# Altium PCB 串口mcu板V1.21.PcbDoc
Units mil, origin at the board's own origin, x right, y up, seen from the top; angles counter-clockwise.
Board outline 2362.2 x 1771.65 mil, 2 copper layers (Top Layer, Bottom Layer); 49 components, 76 nets, 217 pads, 41 vias.
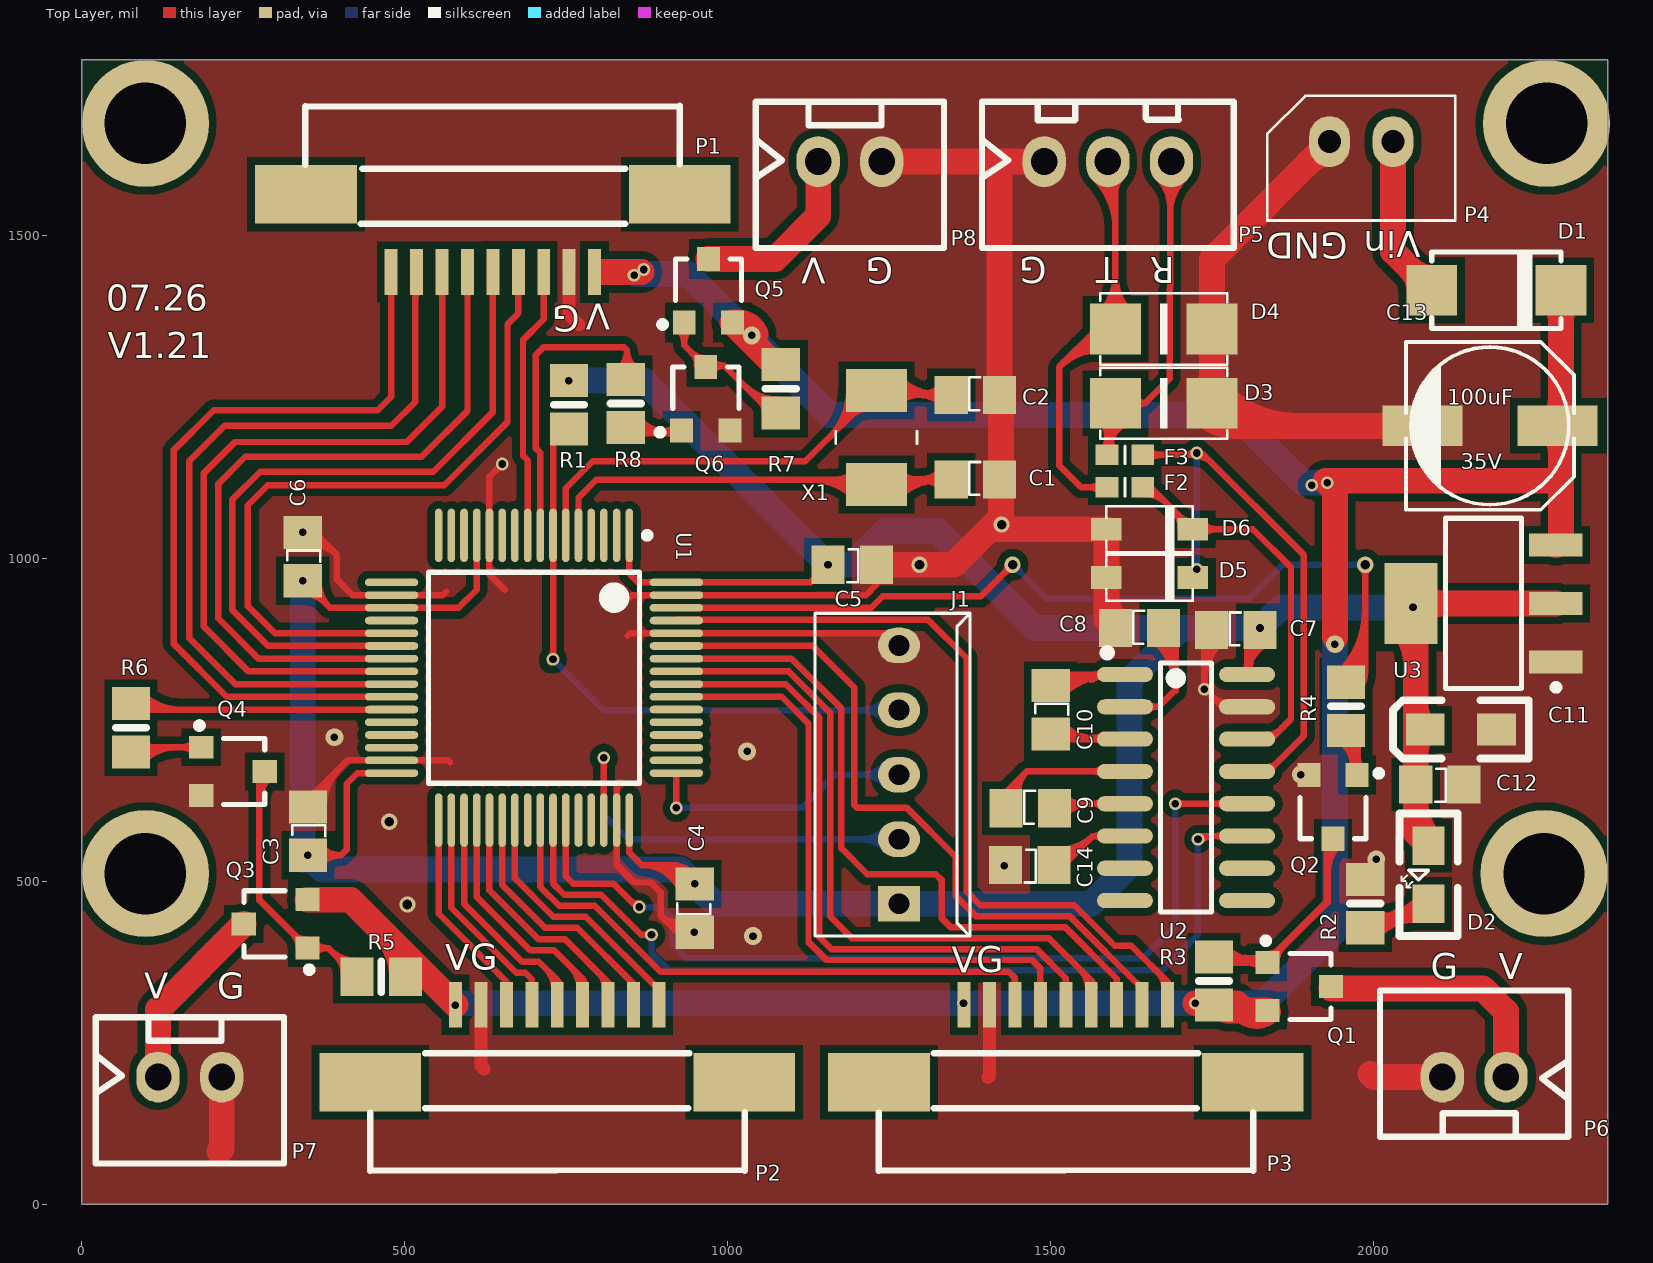
[diagram p0: Top Layer view]
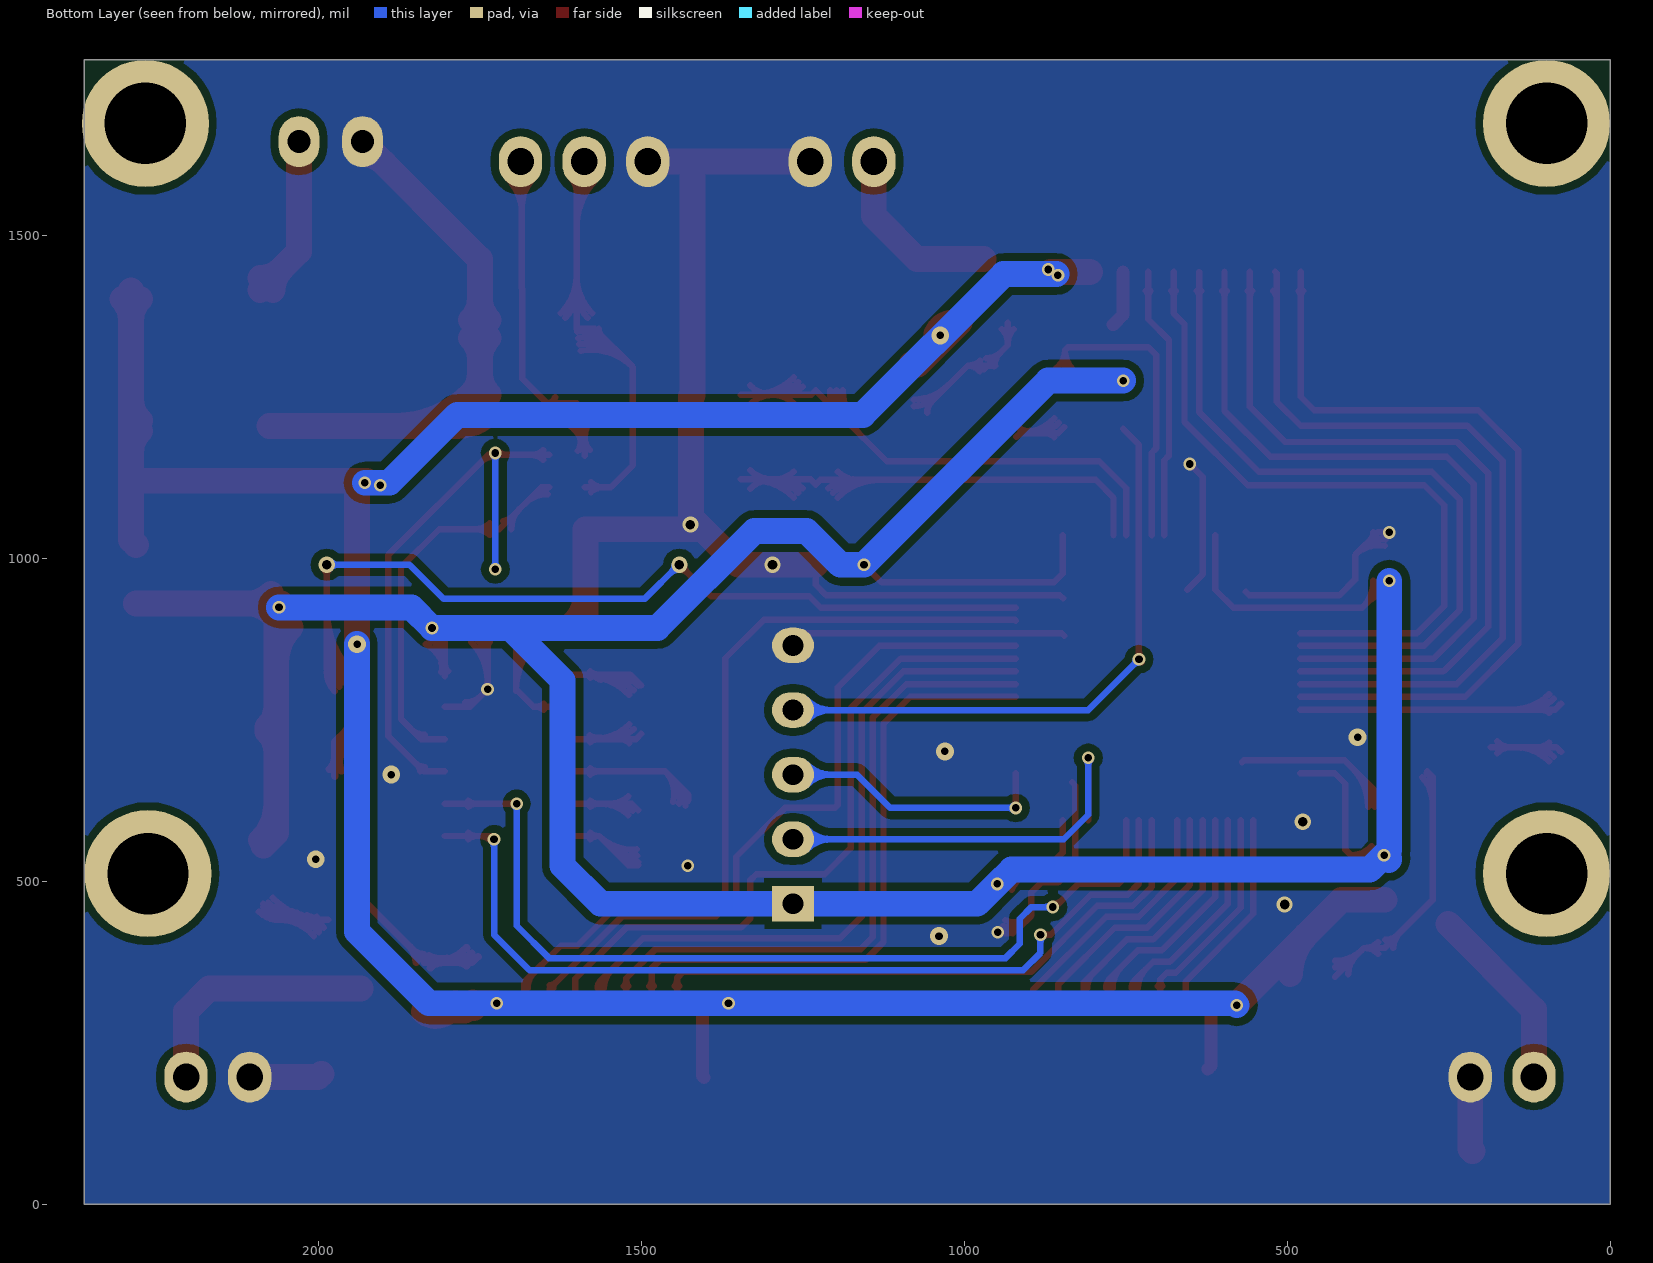
[diagram p1: Bottom Layer view, seen from below]
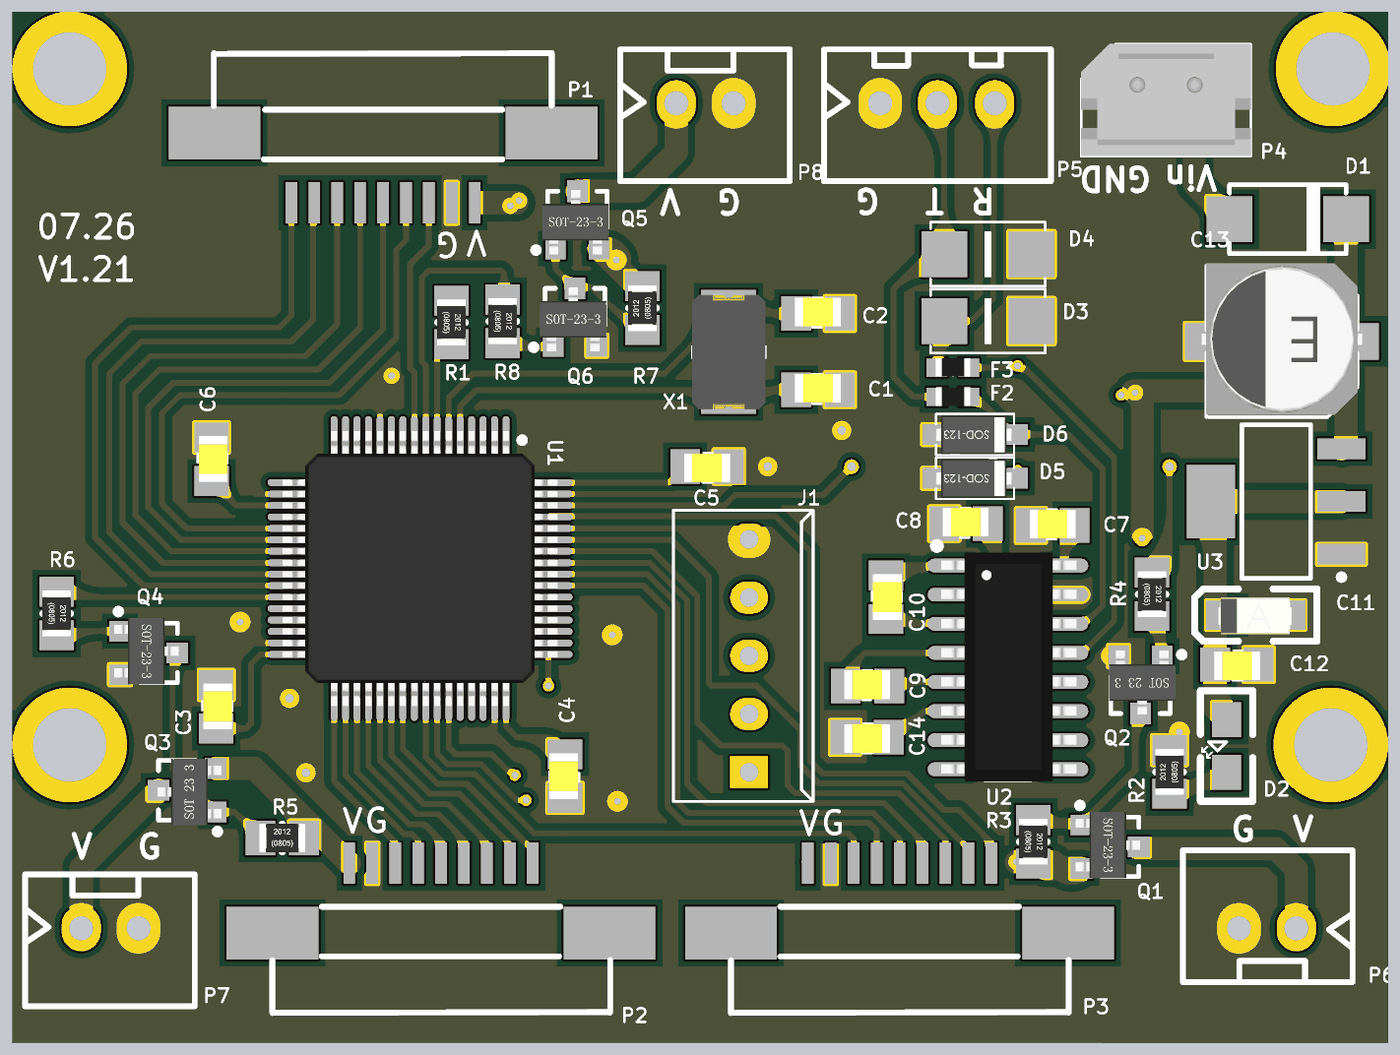
[diagram p2: 3D render of the assembled board from above, using the file's embedded part models]

## Layer stack, top to bottom
Top Layer: signal copper 1.4
Dielectric: dielectric 12.6, FR-4, Dk 4.8
Bottom Layer: signal copper 1.4

## Board outline
0,0 2362.2,0 2362.2,1771.65 0,1771.65

## Design rules (kind name [scope] priority, off if disabled: settings)
Clearance [All] p1: gap=12
ComponentClearance [All] p1 off: gap=10 collisioncheckmode=3 verticalgap=10 showdistances=FALSE
PolygonConnect [All] p1: connectstyle=Direct reliefconductorwidth=10 reliefentries=4 polygonreliefangle="90 Angle"
RoutingVias [All] p1: holewidth=28 width=50 viastyle="Through Hole" minholewidth=28 minwidth=50 maxholewidth=28 maxwidth=50
SilkscreenOverComponentPads [All] p1: minsilkscreentomaskgap=10
SolderMaskExpansion [All] p1: expansion=4
Width [All] p1: maxlimit=100 minlimit=10 preferedwidth=10 minimp=50.000000 maximp=50.000000 favimp=50.000000
26 further rules are at their usual default settings.

## Classes and differential pairs
component class U_Power: C8 C9 C10 C11 C12 C13 C14 D1 D2 D3 D4 D5 D6 F2 F3 P4 P5 P6 P7 P8 Q1 Q2 Q3 Q4 Q5 Q6 R2 R3 R4 R5 R6 R7 R8 U2 U3
component class MCU: C1 C2 C3 C4 C5 C6 C7 J1 P1 P2 P3 R1 U1 X1

## Components (designator, comment, footprint, x,y, rotation, side; value= is the part's Value field where it differs from the comment)
C1 "20pF" C2012 1346,1122 r0 top
C2 "20pF" C2012 1346,1253 r0 top
C3 "0.1uF" C2012 350,615 r270 top
C4 "0.1uF" C2012 949,421 r90 top
C5 "0.1uF" C2012 1230,990 r180 top
C6 "0.1uF" C2012 342,1040 r270 top
C7 "0.1uF" C2012 1749,889 r0 top
C8 "0.1uF" C2012 1600,892 r0 top
C9 "0.1uF" C2012 1431,613 r0 top
C10 "0.1uF" C2012 1500,803 r270 top
C11 "100uF/6.3V" 3216 2080,735 r180 top
C12 "0.1uF" C2012 2140,650 r180 top
C13 "100uF/35V" ECS6.3/6.6 2180,1205 r0 top
C14 "0.1uF" C2012 1505,525 r180 top
D1 "SS34" SMA_DO-214AC 2090,1415 r0 top
D2 "红色发光二极管" LED/S 2085,555 r270 top (schematic designator D6)
D3 "RLM102-201M" RLM102 1675,1240 r0 top
D4 "RLM102-201M" RLM102 1675,1355 r0 top
D5 "SMFJ15" SOD-123 1720,970 r180 top
D6 "SMFJ15" SOD-123 1720,1045 r180 top
F2 "SMD0603P010TF" 1608 1615,1110 r0 top
F3 "SMD0603P010TF" 1608 1615,1160 r0 top
J1 "SWD" ch2.5/5 1265,465 r90 top (schematic designator J2)
P1 "Header 9" FPC-9B 900,1496.06 r180 top locked
P2 "Header 9" FPC-9B 472.44,255.91 r0 top locked
P3 "Header 9" FPC-9B 1259.84,255.91 r0 top locked
P4 "PowerIN" 5264-2 2030,1645 r180 top locked
P5 "Header 3" B3B-XH-A 1490,1614.17 r0 top locked
P6 "LED_POWER" B2B-XH-A 2204.72,196.85 r180 top locked
P7 "LED_POWER" B2B-XH-A 118.11,196.85 r0 top locked
P8 "LED_POWER" B2B-XH-A 1140,1614.17 r0 top locked
Q1 "AO3401" SOT-23 1885,337 r270 top
Q2 "9013" sot-23 1937,615 r180 top
Q3 "AO3401" SOT-23 300,434 r90 top
Q4 "9013" sot-23 234,670 r270 top
Q5 "AO3401" SOT-23 970,1414 r0 top
Q6 "9013" sot-23 966,1247 r0 top
R1 "10K" 2012 754,1275 r270 top
R2 "1K" 2012 1987,428 r90 top
R3 "10K" 2012 1753,383 r270 top
R4 "10K" 2012 1957,808 r270 top
R5 "10K" 2012 426,352 r0 top
R6 "10K" 2012 76,775 r270 top
R7 "10K" 2012 1082,1225 r90 top
R8 "10K" 2012 842,1277 r270 top
U1 "STM32F105R" LQFP64_M 700,815 r270 top
U2 "MAX3232" SO16 1615,820 r270 top
U3 "AS1117-3V3" SOT223_L 2170,930 r180 top
X1 "25MHz" SMD2_50X32 1230,1187 r90 top

## Footprints (in the part's own frame and the unit in brackets; to place one, negate y for a bottom-side part, rotate by r counter-clockwise, add the part's x,y. Pads: shape width x height; smd on the part's side, far side on the other; paste and mask are expansions set on the pad)
1608 [mm]
  rect 0.9x0.8 smd: 1(-0.7,0) 2(0.7,0)
  silkscreen extent 0,-0.35 0,0.35, body extent -0.75,-0.39 0.75,0.41, height 0.45
2012 [mm]
  rect 1.3x1.5 smd: 1(0,0) 2(1.9,0)
  silkscreen extent 0.95,-0.6 0.95,0.6, body extent -0.05,-0.62 1.95,0.62, height 0.45
3216 [mil]
  rect 60x50 smd: 1(0,0) 2(-110,0)
  silkscreen extent -160,-45 50,45, body extent -117,-30 9,33, height 63
5264-2 [mm]
  oval 1.6x2 hole 0.9: 1(0,0) 2(2.5,0)
  silkscreen extent -2.45,-1.8 4.95,3.1, body extent -2.46,-1.82 4.94,3.08, height 5.95
B2B-XH-A [mm]
  oval 1.7x2 hole 1.05: 1(0,0) 2(2.5,0)
  silkscreen extent -2.45,-3.4 4.95,2.35
B3B-XH-A [mm]
  oval 1.7x2 hole 1.05: 1(0,0) 2(2.5,0) 3(5,0)
  silkscreen extent -2.45,-3.4 7.45,2.35
C2012 [mm]
  rect 1.3x1.5 smd: 1(0,0) 2(1.9,0)
  silkscreen extent 0.71,-0.61 1.14,0.69, body extent -0.06,-0.56 1.94,0.69, height 0.5
ch2.5/5 [mil]
  rect 55x65 hole 32: 1(0,0)
  oval 55x65 hole 32: 2(100,0) 3(200,0) 4(300,0) 5(400,0)
  silkscreen extent -50,-110 450,130, body extent -50,-110 450,130, height 394
ECS6.3/6.6 [mm]
  rect 3.15x1.6 smd: 1(2.65,0) 2(-2.65,0)
  silkscreen extent -3.3,-3.3 3.3,3.3, body extent -3.5,-3.2 3.5,3.4, height 5.2
FPC-9B [mm]
  rect 4x2.3 smd: 0(-0.655,-1.708) 0(14.045,-1.708)
  rect 0.508x1.8 smd: 1(2.695,1.342) 2(3.695,1.342) 3(4.695,1.342) 4(5.695,1.342) 5(6.695,1.342) 6(7.695,1.342) 7(8.695,1.342) 8(9.695,1.342) 9(10.695,1.342)
  silkscreen extent -0.66,-5.2 14.07,-0.56
LED/S [mil]
  rect 60x50 smd: A(0,0) K(90,0)
  silkscreen extent -50,-45 140,45, body extent 9,-25 88,25, height 43
LQFP64_M [mm]
  oval 2.1x0.3 smd: 1(-5.6,3.75) 2(-5.6,3.25) 3(-5.6,2.75) 4(-5.6,2.25) 5(-5.6,1.75) 6(-5.6,1.25) 7(-5.6,0.75) 8(-5.6,0.25) 9(-5.6,-0.25) 10(-5.6,-0.75) 11(-5.6,-1.25) 12(-5.6,-1.75) 13(-5.6,-2.25) 14(-5.6,-2.75) 15(-5.6,-3.25) 16(-5.6,-3.75) 33(5.6,-3.75) 34(5.6,-3.25) 35(5.6,-2.75) 36(5.6,-2.25) 37(5.6,-1.75) 38(5.6,-1.25) 39(5.6,-0.75) 40(5.6,-0.25) 41(5.6,0.25) 42(5.6,0.75) 43(5.6,1.25) 44(5.6,1.75) 45(5.6,2.25) 46(5.6,2.75) 47(5.6,3.25) 48(5.6,3.75)
  oval 0.3x2.1 smd: 17(-3.75,-5.6) 18(-3.25,-5.6) 19(-2.75,-5.6) 20(-2.25,-5.6) 21(-1.75,-5.6) 22(-1.25,-5.6) 23(-0.75,-5.6) 24(-0.25,-5.6) 25(0.25,-5.6) 26(0.75,-5.6) 27(1.25,-5.6) 28(1.75,-5.6) 29(2.25,-5.6) 30(2.75,-5.6) 31(3.25,-5.6) 32(3.75,-5.6) 49(3.75,5.6) 50(3.25,5.6) 51(2.75,5.6) 52(2.25,5.6) 53(1.75,5.6) 54(1.25,5.6) 55(0.75,5.6) 56(0.25,5.6) 57(-0.25,5.6) 58(-0.75,5.6) 59(-1.25,5.6) 60(-1.75,5.6) 61(-2.25,5.6) 62(-2.75,5.6) 63(-3.25,5.6) 64(-3.75,5.6)
  silkscreen extent -5.72,-4.15 4.15,4.58, body extent -6,-6 6,6, height 1.6
RLM102 [mm]
  rect 2x2 smd: 1(-1.9,0) 2(1.9,0)
  silkscreen extent -2.5,-1.4 2.5,1.4
SMA_DO-214AC [mm] "5.08mm X 3.0mm SMD"
  rect 2x2 smd: 1(0,0) 2(5.08,0)
  silkscreen extent 0,-1.5 5.08,1.5, body extent -0.03,-1.6 5.11,1.6, height 2
SMD2_50X32 [mm]
  rect 1.7x2.4 smd: 1(1.85,0) 2(-1.85,0)
  silkscreen extent -0.25,-1.6 0.25,1.6, body extent -2.51,-1.6 2.49,1.6, height 1.35
SO16 [mm]
  oval 0.6x2.2 smd: 1(0,0) 2(1.27,0) 3(2.54,0) 4(3.81,0) 5(5.08,0) 6(6.35,0) 7(7.62,0) 8(8.89,0) 9(8.89,4.8) 10(7.62,4.8) 11(6.35,4.8) 12(5.08,4.8) 13(3.81,4.8) 14(2.54,4.8) 15(1.27,4.8) 16(0,4.8)
  silkscreen extent -1,-0.85 9.34,3.4, body extent -0.57,-0.52 9.41,5.38, height 1.45
SOD-123 [mm]
  rect 1.2x0.9 smd: 1(3.4,0) 2(0,0)
  silkscreen extent 0,-0.91 3.4,0.9, body extent -0.17,-0.84 3.68,0.86, height 0.92
SOT223_L [mm] "SOT223, 4-Leads, Body 6.5x3.5mm, Pitch 2.3mm, Lead Span 7mm, IPC High Density"
  rect 2.1x0.9 smd: 1(-2.85,2.3) 2(-2.85,0) 3(-2.85,-2.3)
  rect 2.1x3.2 smd: 2(2.85,0)
  silkscreen extent -2.98,-3.35 1.5,3.42, body extent -1.85,-3.35 1.85,3.35, height 1.7
SOT-23 [mm]
  rect 0.9x0.95 smd: 1(-0.95,-1.25) 2(0.95,-1.25) 3(0,1.25)
  silkscreen extent -1.93,-1.45 1.3,1.25, body extent -1.53,-1.5 1.37,1.3, height 1.2
sot-23 [mm]
  rect 0.9x0.95 smd: 1(-0.95,-1.25) 2(0.95,-1.25) 3(0,1.25)
  silkscreen extent -1.93,-1.45 1.3,1.25, body extent -1.53,-1.5 1.37,1.3, height 1.2

## Part data
C1 C2 C3 C4 C5 C6 C7 C12: library part Cap, "Capacitor"
C8 C9 C10 C14: library part CAP, "Capacitor"
C11 C13: library part "Cap Pol1", "Polarized Capacitor (Radial)"
D1 D5 D6: library part Diode, "Default Diode"
D2: library part LED
D3 D4 F2 F3 R1 R2 R3 R4 R5 R6 R7 R8: library part Res2, "Resistor"
J1: library part "Header 5", "Header, 5-Pin"
P1 P2 P3: "Header, 9-Pin"
P4 P6 P7 P8: library part "Header 2", "Header, 2-Pin"
P5: "Header, 3-Pin"
Q1 Q3 Q5: library part PMOS-2, "P-Channel Power MOSFET"
Q2 Q4 Q6: library part NPNBT
U1: library part STM32F
U2: library part ST3232, "3.3V/5V Dual RS232 Transceiver w/ Int. Cap."
U3: library part LM117T
X1: library part CRYSTAL

## Free pads (board coordinates)
  round 196.85 hole 125.98: 0(98.43,511.81) 0(98.43,1673.23) 0(2263.78,511.81) 0(2267.72,1673.23)

## Via types
v1: diameter 19.68, hole 11.81, Top Layer to Bottom Layer, 28 vias
v2: diameter 27.56, hole 11.81, Top Layer to Bottom Layer, 7 vias
v3: diameter 25, hole 15, Top Layer to Bottom Layer, 6 vias

## Nets (pads, with @x,y where several pads share a name; then routed paths per layer and width w, separated by ;. In a path a pad name is that pad's centre, name@x,y a point inside that pad or via, vN(x,y) a via of type N, cw(c..) or ccw(c..) an arc to the next point about the centre after c; other vN are vias at no path point)
+3V3: C3.2 C4.2 C5.2 C6.2 C7.2 C11.1 C12.2 D2.A J1.1 R1.1 U1.1 U1.13 U1.19 U1.32 U1.48 U1.64 U2.16 U3.2 | length 6705.5
  Top Layer w10: C6.2@342,960.35 cw(c342,948.66) 350.27,956.93 cw(c358.53,965.2) C6.2@346.84,965.2 ; v1(342,965.2) 383.93,923.27 U1.19 583.27,923.27 611.42,951.42 U1.13 ; C6.2@345.94,944.61 cw(c345.94,904.4) 374.37,932.83 ; v1(350,540.2) 401.2,540.2 ; C3.2@353.42,536.77 cw(c361.69,528.51) 361.69,540.2 cw(c361.69,551.89) C3.2@353.42,543.62 ; C6.2@356.53,965.2 ccw(c391.6,965.2) C6.2@366.8,940.4 ; C6.2@366.53,965.2 ccw(c425.74,965.2) 383.87,923.33 ; C3.2@369.02,526.18 cw(c401.19,496.26) 401.19,540.2 ; C3.2@369.02,554.22 ccw(c401.19,584.13) 401.19,540.2 ; U1.32 426.36,667.36 410,651 410,549 401.2,540.2 ; U1.48 847.64,544.36 867,525 ; U1.1 847.64,976.36 861.36,962.64 U1.64 1127.83,962.64 v1(1155.2,990) ; 882.68,525 cw(c882.68,466.79) C4.2@935.46,491.34 ; 898.36,525 cw(c898.36,474.08) C4.2@944.53,495.55 ; 914.04,525 cw(c914.04,481.38) C4.2@953.6,499.77 ; C4.2@924.83,499.63 ccw(c896.91,504.9) 917,525 ; C4.2@926.39,487.12 ccw(c867,459.5) 867,525 ; C4.2@933.18,509.11 ccw(c951.54,524.48) C4.2@949.43,500.63 ; C4.2@935.95,506.05 ccw(c949,519.1) C4.2@949,500.65 ; C4.2@939.79,516.25 cw(c922.95,502.15) C4.2@944.3,496.95 ; C4.2@942.52,516.24 cw(c938.72,546.72) 917,525 ; v1(949,495.8) 946.2,495.8 917,525 ; C5.2@1150.35,990 cw(c1138.66,990) 1146.93,981.73 cw(c1155.2,973.47) C5.2@1155.2,985.16 ; U2.16@1799.16,824.82 ccw(c1787.53,836.44) 1803.98,836.44 ccw(c1820.42,836.44) U2.16@1808.79,824.82 ; U2.16@1800.57,825.9 ccw(c1791.05,842.4) 1809.45,837.47 ; U2.16@1803.98,817.05 cw(c1860.82,817.05) C7.2@1833.65,866.98 ; U2.16 1803.98,869.17 C7.2 ; 1803.98,833.88 cw(c1851.66,833.88) C7.2@1828.87,875.76 ; 1803.98,850.71 cw(c1842.5,850.71) C7.2@1824.09,884.54 ; C7.2@1803.98,867.53 cw(c1833.34,867.53) C7.2@1819.3,893.33 ; C7.2@1808.44,883 cw(c1819.86,870.99) C7.2@1823.06,887.25 ; 1808.49,833.9 ccw(c1821.86,830.32) U2.16@1809.87,823.41 ; C7.2@1809.74,870.9 ccw(c1788.83,892.89) C7.2@1819.16,892.12 ; C7.2@1813.75,878.95 ccw(c1800.7,892) C7.2@1819.16,892 ; 867,525 917,525
  Top Layer w40: U3.2@2042.71,893.26 cw(c1988.41,838.96) 2065.2,838.96 ; 2065.2,619.88 ccw(c2144.88,619.88) D2.A@2088.54,563.54 ; 2065.2,699.26 cw(c2110.74,699.26) C11.1@2078.54,731.46 ; 2065.2,770.74 ccw(c2110.74,770.74) C11.1@2078.54,738.54 ; U3.2@2072.88,914.91 cw(c2109.31,878.48) 2109.31,930 cw(c2109.31,981.52) U3.2@2072.88,945.09 ; D2.A 2065.2,574.8 C12.2 2065.2,922.6 2057.8,930 U3.2@2282.2,930
  Bottom Layer w40: v1@342,534.99 ccw(c344.79,534.99) 342.82,533.01 ; v1(342,965.2) 342,548.2 v1(350,540.2) 372.2,518 926.8,518 v1(949,495.8) 979.8,465 J1.1 1563,465 1622,524 1622,811 1703,892 ; v1(754,1275) 870.2,1275 v1(1155.2,990) 1192,990 1244,1042 1325,1042 1475,892 v1(1824,892) 1856,924 v1(2061,924)
GND: C1.2 C2.2 C3.1 C4.1 C5.1 C6.1 C7.1 C8.1 C11.2 C12.1 C13.2 C14.2 D3.2 D4.2 D5.1 D6.1 J1.5 P1.2 P2.2 P3.2 P4.2 P5.1 P6.2 P7.2 P8.2 Q2.2 Q4.2 Q6.2 R2.2 U1.12 U1.18 U1.31 U1.47 U1.60 U1.63 U2.15 U3.1 | length 6013.5
  Top Layer w10: v1(342,1040) 360,1040 395,1005 ; C6.1@345.42,1036.58 cw(c353.69,1028.31) 353.69,1040 cw(c353.69,1051.69) C6.1@345.42,1043.42 ; C6.1@347.66,1029.55 cw(c353.95,991.48) 381.23,1018.77 ; C6.1@349.29,1019.68 cw(c357.85,967.86) 395,1005 ; C3.1 350,626 411.05,687.05 U1.31 566.95,687.05 570,684 ; C3.1@353.94,635.59 ccw(c353.94,649.24) C3.1@363.59,639.59 ; C3.1@354.53,615 cw(c392.01,615) 365.51,641.51 ; C3.1@364.53,615 cw(c426.16,615) 382.58,658.58 ; C6.1@366.53,1040 ccw(c382.29,1040) C6.1@371.14,1028.86 ; C3.1@374.53,615 cw(c460.3,615) 399.65,675.65 ; 564,948 558.95,942.95 U1.18 419.05,942.95 395,967 395,1005 ; v1@646.16,1146 cw(c634.47,1146) 642.73,1137.73 cw(c651,1129.47) v1@651,1141.16 ; v1(651,1146) 631.1,1126.1 U1.12 631.1,974.9 655,951 ; 833,653 827.95,647.95 U1.47 827.95,525.05 855,498 881,498 896,483 896,447 ; 845,880 848.9,883.9 U1.60 1246.1,883.9 J1.5 ; 847,938 851.95,942.95 U1.63 1213.95,942.95 1230,959 C5.1 ; 906.17,436.83 ccw(c927.87,458.53) C4.1@940.65,430.63 ; 916.34,426.66 ccw(c934.26,444.58) C4.1@944.82,421.54 ; C4.1@921.82,427 cw(c921.82,394.82) C4.1@944.58,417.58 ; C4.1@924.55,419.17 ccw(c916,418.41) 916,427 ; C4.1@928.55,433.3 cw(c916,442.65) 916,427 ; C4.1@934.88,419.85 cw(c937,407.34) C4.1@944.96,417.23 ; C4.1@936.49,439.72 cw(c921.48,472.48) 896,447 ; C4.1 943,427 916,427 ; C7.1@1734.44,870.5 cw(c1725.85,861.91) C7.1@1738,861.91 ; v1@1734.58,800.42 ccw(c1726.31,808.69) 1738,808.69 ccw(c1749.69,808.69) v1@1741.42,800.42 ; v1@1738,792.16 cw(c1738,780.47) 1746.27,788.73 cw(c1754.53,797) v1@1742.84,797 ; 1738,808.8 cw(c1825.27,808.8) C7.1@1763.56,870.5 ; 1738,832.94 cw(c1801.12,832.94) C7.1@1756.49,877.57 ; 1738,857.08 cw(c1776.98,857.08) C7.1@1749.42,884.65 ; 1748.08,786.92 ccw(c1772.48,811.31) U2.15@1772.48,776.81 ; C7.1 1738,878 v1(1738,797) 1765,770 U2.15 ; 896,447 916,427
  Top Layer w20: P2.2 617.91,214.09 623,209 ; P1.2 754.53,1376.47 769.5,1361.5 ; 1403,196 1405.31,198.31 P3.2
  Top Layer w40: 213,82 216.54,85.54 P7.2 P7.2@226,206.31 ; C5.1 1349.61,990 1404.61,1045 ; P8.2 1416,1614.17 ; P5.1 1416,1614.17 ; 1586.14,942.89 ccw(c1646.95,942.89) C8.1@1603.95,899.89 ; C8.1 1586.14,905.86 D5.1 D6.1 1404.61,1045 ; D3.2@1735.22,1225.41 ccw(c1784.5,1274.69) D3.2@1784.5,1205 ; D3.2@1736.11,1253.7 ccw(c1703.04,1286.76) 1749.8,1286.76 ccw(c1796.57,1286.76) 1763.5,1253.7 ccw(c1881.06,1371.26) 1881.06,1205 ; D4.2@1736.11,1341.3 cw(c1703.04,1308.24) 1749.8,1308.24 cw(c1796.57,1308.24) D4.2@1763.5,1341.3 ; D4.2@1736.11,1368.7 ccw(c1703.04,1401.76) 1749.8,1401.76 ccw(c1796.57,1401.76) D4.2@1763.5,1368.7 ; 1898.51,1611.93 cw(c1931.57,1578.87) P4.2@1931.57,1625.63 ; P4.2 1749.8,1463.23 D4.2 D3.2 1784.8,1205 C13.2 ; 1995,202 2000.15,196.85 P6.2 ; 1404.61,1045 1423,1063.39 1423,1250.8 C2.2 1420.8,1609.37 1416,1614.17
  other v1: 948,421 1428,524
  other v2: 1039,415 2004,534 1887,665 1030,701 391,723
  other v3: 504,464 476,592 1297,990 1424,1052
JTCK/SWCLK: J1.3 U1.49 | length 591.3
  Top Layer w10: v1@917.05,616.9 ccw(c908.78,625.16) 920.47,625.16 ccw(c932.16,625.16) v1@923.9,616.9 ; v1@919,612 v1(920.47,613.47) U1.49
  Bottom Layer w10: v1(920.47,613.47) 1114.47,613.47 1166,665 J1.3 ; v1@923.9,610.05 cw(c932.16,601.78) 932.16,613.47 cw(c932.16,625.16) v1@923.9,616.9 ; J1.3@1244.09,649.09 ccw(c1205.68,610.68) 1205.68,665 ccw(c1205.68,719.32) J1.3@1244.09,680.91 ; J1.3@1251.16,656.16 ccw(c1229.82,634.82) 1229.82,665 ccw(c1229.82,695.18) J1.3@1251.16,673.84
JTMS/SWDIO: J1.2 U1.46 | length 826.8
  Top Layer w10: v1@804.58,687.58 cw(c795.66,678.66) 808.27,678.66 ; v1(808,691) 808.27,690.73 U1.46 ; 808.27,679.96 cw(c819.04,679.96) v1@811.42,687.58
  Bottom Layer w10: v1@804.58,687.58 cw(c796.31,679.31) 808,679.31 cw(c819.69,679.31) v1@811.42,687.58 ; v1(808,691) 808,603 846,565 J1.2 ; J1.2@1244.09,549.09 ccw(c1205.68,510.68) 1205.68,565 ccw(c1205.68,619.32) J1.2@1244.09,580.91 ; J1.2@1251.16,556.16 ccw(c1229.82,534.82) 1229.82,565 ccw(c1229.82,595.18) J1.2@1251.16,573.84
NetC8_2: C8.2 U2.2 | length 431.3
  Top Layer w10: U2.2 1667,770 1694,797 C8.2@1694,871.2 ; U2.2@1651.31,765.18 cw(c1662.94,753.56) 1662.94,770 cw(c1662.94,786.44) U2.2@1651.31,774.82 ; C8.2@1660.58,873.18 cw(c1585.87,795) 1694,795 ; C8.2@1667.49,880.41 cw(c1608.22,818.39) 1694,818.39 ; C8.2@1674.4,887.64 cw(c1630.57,841.78) 1694,841.78 ; C8.2@1681.3,894.87 cw(c1652.93,865.17) C8.2@1694,865.17
NetC9_1: C9.1 U2.4 | length 367.4
  Top Layer w10: C9.1@1431,621 1427,625 1427,634 1463,670 ; C9.1@1431.57,617.1 cw(c1459.81,625.24) 1439.03,646.03 ; C9.1@1441.18,619.87 cw(c1478.42,630.6) 1451.01,658.01 ; C9.1@1450.79,622.64 cw(c1497.03,635.97) 1463,670 ; U2.4@1578.69,665.18 ccw(c1567.06,653.56) 1567.06,670 ccw(c1567.06,686.44) U2.4@1578.69,674.82 ; U2.4 1463,670
NetC9_2: C9.2 U2.5 | length 246.5
  Top Layer w10: C9.2@1504.8,610 1514.8,620 U2.5 ; C9.2@1513.29,609.45 cw(c1538.77,583.97) 1538.77,620 ; C9.2@1520.36,602.38 cw(c1562.91,559.83) 1562.91,620 ; C9.2@1520.36,631.5 ccw(c1548.12,659.25) 1548.12,620 ; U2.5@1578.69,615.18 ccw(c1567.06,603.56) 1567.06,620 ccw(c1567.06,636.44) U2.5@1578.69,624.82
NetC10_1: C10.1 U2.1 | length 365.2
  Top Layer w10: C10.1 1517,820 U2.1 ; C10.1@1504.35,802.58 cw(c1546.4,760.53) 1546.4,820 ; C10.1@1511.43,795.51 cw(c1570.55,736.39) 1570.55,820 ; C10.1@1518.5,788.44 cw(c1594.69,712.25) U2.1@1594.69,820 ; 1561.8,811.63 ccw(c1555.42,836.69) U2.1@1577.65,823.48 ; U2.1@1578.69,815.18 ccw(c1567.06,803.56) 1567.06,820 ccw(c1567.06,836.44) U2.1@1578.69,824.82
NetC10_2: C10.2 U2.3 | length 282.8
  Top Layer w10: C10.2 1508.2,720 U2.3 ; C10.2@1511.43,735.69 ccw(c1549.29,773.55) 1549.29,720 ; C10.2@1518.5,713.64 cw(c1533.86,698.28) 1533.86,720 ; C10.2@1518.5,742.76 ccw(c1573.44,797.7) U2.3@1573.44,720 ; 1562.13,722.36 ccw(c1566.92,745.33) U2.3@1579.77,725.7 ; U2.3@1578.69,715.18 ccw(c1567.06,703.56) 1567.06,720 ccw(c1567.06,736.44) U2.3@1578.69,724.82
NetC14_1: C14.1 U2.6 | length 299.4
  Top Layer w10: C14.1 1520,525 1565,570 ; C14.1@1505.06,529.52 ccw(c1508.87,566.64) 1535.26,540.26 ; C14.1@1506.08,539.47 ccw(c1511.64,593.61) 1550.13,555.13 ; C14.1@1507.1,549.42 ccw(c1514.41,620.58) 1565,570 ; U2.6@1578.69,565.18 ccw(c1567.06,553.56) 1567.06,570 ccw(c1567.06,586.44) U2.6@1578.69,574.82 ; U2.6 1565,570
NetD1_1: D1.1 P4.1 | length 328.3
  Top Layer w40: P4.1 2030,1475 D1.1 ; D1.1@2070.63,1415 ccw(c2023.87,1415) 2056.93,1448.07 ccw(c2090,1481.13) D1.1@2090,1434.37
NetD2_K: D2.K R2.1 | length 644.8
  Top Layer w10: R2.1@1985,440 D2.K@2060,440 ; R2.1@1988.43,440 ccw(c1988.43,556.57) D2.K@2070.86,474.14 ; R2.1@1991.39,427.62 cw(c2017.62,406.03) 2017.62,440 ; R2.1@1991.45,427.7 cw(c2028.69,405.75) 2017.88,447.61 ; R2.1@1999.11,421.27 cw(c2038.81,388.58) 2038.81,440 ; R2.1@1999.67,422.01 cw(c2042.8,392.47) 2033.19,443.85 ; R2.1@2000.06,422.62 cw(c2058.1,388.41) 2041.25,453.64 ; R2.1@2002.57,444.99 ccw(c2015.58,463.97) 2019.8,441.35 ; R2.1@2006.83,414.91 cw(c2060,371.13) 2060,440 ; R2.1@2012.57,440 ccw(c2012.57,532.43) D2.K@2077.93,467.07 ; 2036.72,440 ccw(c2036.72,508.28) D2.K@2085,460 ; D2.K@2060.86,440 ccw(c2060.86,484.14) D2.K@2092.07,452.93 ; D2.K D2.K@2060,440
NetP6_1: P6.1 Q1.3 | length 386.7
  Top Layer w40: Q1.3@1934.21,334 2169,334 2204.72,298.28 P6.1
NetP7_1: P7.1 Q3.3 | length 292.1
  Top Layer w40: P7.1 118.11,301.32 Q3.3
NetP8_1: P8.1 Q5.3 | length 281.8
  Top Layer w40: Q5.3 1073.21,1463.21 1140,1530 P8.1
NetQ1_1: Q1.1 Q2.3 R3.1 | length 635.2
  Top Layer w12: R3.1 1761.6,374.4 Q1.1@1834.4,374.4 ; R3.1@1762.3,388.37 ccw(c1796.02,422.08) 1796.02,374.4 ; R3.1@1770.79,369.15 cw(c1783.47,356.46) 1783.47,374.4 ; R3.1@1770.79,396.85 ccw(c1824.99,451.05) Q1.1@1824.99,374.4 ; 1800.9,380.86 ccw(c1810.47,416.55) Q1.1@1828.94,384.55 ; 1812.75,377.68 cw(c1807.67,358.74) Q1.1@1824.66,368.54 ; Q1.1@1826.52,366.12 ccw(c1806.52,346.12) 1806.52,374.4 ccw(c1806.52,402.69) Q1.1@1826.52,382.69 ; Q1.1 Q1.1@1834.4,374.4 ; Q1.1@1836.77,386.12 ccw(c1836.77,408.68) 1852.73,392.73 ; Q1.1@1848.49,374.4 cw(c1882.5,374.4) 1858.45,398.45 ; 1928,514.79 cw(c1987.01,514.79) Q2.3@1945.28,556.52 ; 1928,543.76 cw(c1958.04,543.76) Q2.3@1936.8,565 ; Q2.3 1928,556.79 1928,468 Q1.1@1834.4,374.4
NetQ2_1: Q2.1 R4.2 | length 272.5
  Top Layer w12: R4.2@1948.44,718.11 cw(c1902.75,662.91) Q2.1@1974.4,662.91 ; R4.2@1956.1,727.35 cw(c1923.87,688.43) 1974.4,688.43 ; R4.2 1974.4,715.8 Q2.1 ; Q2.1@1964.25,671.06 ccw(c1941.5,684.19) 1966.88,690.99 ; Q2.1@1966.12,673.48 ccw(c1946.12,693.48) 1974.4,693.48 ccw(c2002.69,693.48) Q2.1@1982.69,673.48 ; 1966.14,693.74 ccw(c1995.41,701.59) Q2.1@1980.26,675.34
NetQ3_1: Q3.1 Q4.3 R5.1 | length 672.9
  Top Layer w10: 275,621.85 cw(c330.38,621.85) Q4.3@291.22,661.01 ; 275,645.99 cw(c306.24,645.99) Q4.3@284.15,668.08 ; Q4.3 275,661.79 275,470.81 Q3.1 381.4,396.6 R5.1 ; 325.82,419.99 cw(c302.44,396.6) Q3.1@335.51,396.6 ; 328.2,417.61 ccw(c348.23,437.64) Q3.1@348.23,409.31 ; Q3.1@359.19,387.61 cw(c380.9,365.9) 380.9,396.6 cw(c380.9,427.3) Q3.1@359.19,405.59 ; 384.13,393.87 ccw(c426,435.74) R5.1@426,376.53 ; 393.63,384.37 cw(c365.2,355.94) R5.1@405.41,355.94 ; R5.1@401.2,376.8 ccw(c426,401.6) R5.1@426,366.53
NetQ4_1: Q4.1 R6.2 | length 277.5
  Top Layer w10: R6.2 83.2,707.4 Q4.1 ; R6.2@87.43,692.71 cw(c122.9,657.24) 122.9,707.4 ; R6.2@94.5,685.64 cw(c147.04,633.09) 147.04,707.4 ; R6.2@94.5,714.76 ccw(c112.25,732.51) 112.25,707.4 ; Q4.1@174.81,698.41 ccw(c153.1,676.7) 153.1,707.4 ccw(c153.1,738.1) Q4.1@174.81,716.39
NetQ5_1: Q5.1 Q6.3 R7.1 | length 469.9
  Top Layer w10: Q5.1@923.61,1354.81 cw(c901.9,1333.1) 932.6,1333.1 cw(c963.3,1333.1) Q5.1@941.59,1354.81 ; Q5.1 932.6,1329.61 Q6.3@970,1292.21 ; 942.61,1319.6 ccw(c966,1342.99) Q6.3@966,1309.91 ; 944.99,1317.22 cw(c924.96,1297.2) Q6.3@953.28,1297.2 ; Q6.3@952,1298.21 994.79,1298.21 ; Q6.3@974.99,1306.19 ccw(c994.25,1325.45) 994.25,1298.21 ; Q6.3@975.88,1289.2 cw(c994.79,1273.89) 994.79,1298.21 ; 1025.73,1267.27 ccw(c1078.06,1319.59) R7.1@1078.06,1245.59 ; 1042.81,1250.19 ccw(c1078.06,1285.45) R7.1@1078.06,1235.59 ; 1050.03,1242.97 cw(c1032.06,1225) R7.1@1057.47,1225 ; R7.1@1053,1240 994.79,1298.21
NetQ6_1: Q6.1 R8.2 | length 261.2
  Top Layer w10: R8.2@845,1203.2 854.41,1193.79 914,1193.79 cw(c914,1267.56) R8.2@860.79,1216.46 ; R8.2@853.58,1209.53 ccw(c890.53,1245.02) 890.53,1193.79 ; R8.2@860.5,1187.64 cw(c875.34,1172.79) 875.34,1193.79 ; 890.62,1193.79 ccw(c890.62,1234.78) Q6.1@919.61,1205.8 ; 898.02,1197.47 ccw(c902.19,1215.57) Q6.1@917.87,1205.6 ; 905.18,1193.79 cw(c905.18,1173.38) Q6.1@919.61,1187.81
OSC_IN: C1.1 U1.5 X1.2 | length 1130.9
  Top Layer w10: U1.5 768.9,1093.9 796.5,1121.5 1222.66,1121.5 X1.2 1237.86,1122 C1.1 ; 1129.76,1121.5 cw(c1129.76,1027.69) X1.2@1196.1,1094.02 ; 1153.91,1121.5 cw(c1153.91,1051.83) X1.2@1203.17,1101.09 ; 1165.25,1121.5 ccw(c1165.25,1165.12) X1.2@1196.1,1134.28 ; 1178.05,1121.5 cw(c1178.05,1075.97) X1.2@1210.24,1108.16 ; X1.2@1249.77,1108.16 cw(c1283.17,1074.76) 1283.17,1122 ; X1.2@1256.84,1101.09 cw(c1307.32,1050.62) 1307.32,1122 ; X1.2@1263.91,1094.02 cw(c1331.46,1026.48) C1.1@1331.46,1122 ; X1.2@1263.91,1134.28 ccw(c1293.55,1163.92) 1293.55,1122 ; C1.1@1331.44,1107.44 ccw(c1296.29,1072.29) 1296.29,1122 ccw(c1296.29,1171.71) C1.1@1331.44,1136.56
OSC_OUT: C2.1 U1.6 X1.1 | length 1220.1
  Top Layer w10: U1.6 749.21,1108.21 791,1150 1120.19,1150 X1.1 1236.83,1253 C2.1 ; 1157.89,1187.7 ccw(c1085.78,1259.82) X1.1@1187.76,1259.82 ; 1174.96,1204.77 ccw(c1119.92,1259.82) X1.1@1197.76,1259.82 ; 1191.16,1220.97 cw(c1216.23,1195.9) X1.1@1216.23,1231.35 ; 1192.03,1221.85 ccw(c1154.06,1259.82) X1.1@1207.76,1259.82 ; X1.1@1249.77,1265.8 ccw(c1280.68,1296.72) 1280.68,1253 ; X1.1@1256.84,1272.88 ccw(c1304.83,1320.86) 1304.83,1253 ; X1.1@1263.91,1239.69 cw(c1296.04,1207.56) 1296.04,1253 ; X1.1@1263.91,1279.95 ccw(c1328.97,1345) C2.1@1328.97,1253 ; C2.1@1331.44,1238.44 ccw(c1296.29,1203.29) 1296.29,1253 ccw(c1296.29,1302.71) C2.1@1331.44,1267.56
PA0: U1.14
PA1: U1.15
PA2: U1.16
PA3: U1.17
PA4: U1.20
PA5: P1.4 U1.21 | length 1109.5
  Top Layer w10: U1.21 299.1,883.9 257,926 257,1082 288,1113 561,1113 659,1211 659,1362.21 675.79,1379 P1.4 ; P1.4@672.25,1414.26 cw(c663.72,1405.72) 675.79,1405.72 cw(c687.86,1405.72) P1.4@679.32,1414.26
PA6: P1.5 U1.22 | length 1135.9
  Top Layer w10: U1.22 288.79,864.21 233,920 233,1091 276,1134 544,1134 636.42,1226.42 P1.5 ; P1.5@632.88,1414.24 cw(c624.35,1405.71) 636.42,1405.71 cw(c648.49,1405.71) P1.5@639.95,1414.24
PA7: P1.6 U1.23 | length 1169.4
  Top Layer w10: U1.23 273.47,844.53 211,907 211,1115 253,1157 526,1157 597.05,1228.05 P1.6 ; P1.6@593.51,1414.26 cw(c584.98,1405.72) 597.05,1405.72 cw(c609.12,1405.72) P1.6@600.58,1414.26
PA8: P3.3 U1.41 | length 957.1
  Top Layer w10: U1.41 709.84,491.16 739,462 794,462 896,360 1435,360 1444.68,350.31 P3.3 ; P3.3@1441.15,337.71 ccw(c1432.61,346.24) 1444.68,346.24 ccw(c1456.76,346.24) P3.3@1448.22,337.71
PA9: U1.42 U2.11 | length 1522.4
  Top Layer w10: U1.42 729.53,496.47 747,479 804,479 866,417 v1(882,417) ; v1@878.58,413.58 ccw(c870.31,405.31) 870.31,417 ccw(c870.31,428.69) v1@878.58,420.42 ; v1(1728,565) 1733,570 U2.11 ; v1@1731.42,561.58 cw(c1751.76,541.24) 1751.76,570 ; U2.11@1767.66,565.18 ccw(c1756.04,553.56) 1756.04,570 ccw(c1756.04,586.44) U2.11@1767.66,574.82
  Bottom Layer w10: v1@878.58,413.58 cw(c870.31,405.31) 882,405.31 cw(c893.69,405.31) v1@885.42,413.58 ; v1(882,417) 882,389 909,362 1673,362 1728,417 v1(1728,565) v1@1729,566 ; v1@1724.58,561.58 cw(c1716.31,553.31) 1728,553.31 cw(c1739.69,553.31) v1@1731.42,561.58
PA10: U1.43 U2.12 | length 1520.4
  Top Layer w10: U1.43 749.21,507.79 761,496 823,496 853.5,465.5 ccw(c857.97,469.97) v1@860.82,464.32 ; 847.9,471.1 ccw(c863,486.19) v1@863,464.84 ; v1(1693,620) U2.12 ; v1@1696.42,616.58 cw(c1704.69,608.31) 1704.69,620 cw(c1704.69,631.69) v1@1696.42,623.42 ; U2.12@1767.66,615.18 ccw(c1756.04,603.56) 1756.04,620 ccw(c1756.04,636.44) U2.12@1767.66,624.82
  Bottom Layer w10: v1(863,460) 896,460 914,442 914,403 936,381 1643,381 1693,431 v1(1693,620) ; v1@866.42,456.58 cw(c874.69,448.31) 874.69,460 cw(c874.69,471.69) v1@866.42,463.42 ; v1@1689.58,616.58 cw(c1681.31,608.31) 1693,608.31 cw(c1704.69,608.31) v1@1696.42,616.58
PA11: U1.44
PA12: U1.45
PA15: U1.50
PB0: P1.9 U1.26 | length 1254.3
  Top Layer w10: P1.9@475.4,1414.26 cw(c466.87,1405.72) 478.94,1405.72 cw(c491.01,1405.72) P1.9@482.47,1414.26 ; P1.9 478.94,1249.94 458,1229 204,1229 142,1167 142,868 224.53,785.47 U1.26
PB1: R6.1 U1.27 | length 530.2
  Top Layer w10: R6.1 85.21,765.79 U1.27 ; R6.1@87.43,782.49 ccw(c127.75,822.81) 127.75,765.79 ; R6.1@94.5,760.44 cw(c107.41,747.53) 107.41,765.79 ; R6.1@94.5,789.56 ccw(c151.89,846.95) 151.89,765.79
PB2: U1.28
PB3: P3.4 U1.55 | length 1011
  Top Layer w10: U1.55 1083.53,785.47 1125,744 1125,406 1153,378 1471.06,378 1484.06,365 P3.4 ; P3.4@1480.52,337.71 ccw(c1471.98,346.24) 1484.06,346.24 ccw(c1496.13,346.24) P3.4@1487.59,337.71
PB4: P3.5 U1.56 | length 1050.7
  Top Layer w10: U1.56 1090,805.16 1142,753.16 1142,413.04 1160.04,395 1478.1,395 1523.43,349.67 P3.5 ; P3.5@1519.89,337.72 ccw(c1511.35,346.26) 1523.43,346.26 ccw(c1535.5,346.26) P3.5@1526.96,337.72
PB5: P3.6 U1.57 | length 1127.4
  Top Layer w10: U1.57 1094.36,824.84 1159,760.2 1159,445 1192,412 1497.04,412 1562.8,346.24 ; 1545.72,363.32 cw(c1516.58,334.17) P3.6@1557.8,334.17 ; P3.6@1559.26,337.71 ccw(c1550.72,346.24) 1562.8,346.24 ; P3.6 1562.8,346.24 ; P3.6@1566.33,337.71 cw(c1574.87,346.24) 1562.8,346.24 ; P3.6@1567.8,334.17 ccw(c1550.72,334.17) 1562.8,346.24
PB6: P3.7 U1.58 | length 1088.4
  Top Layer w10: U1.58 1098.71,844.53 1176,767.24 1176,551 1216,511 1322,511 1331,502 1331,443 1345,429 1522.17,429 1602.17,349 P3.7
PB7: P3.8 U1.59 | length 1127
  Top Layer w10: U1.59 1131.79,864.21 1196,800 1196,618 1200,614 1276.86,614 1353,537.86 1353,477 1384,446 1529.21,446 1641.54,333.67 P3.8 ; P3.8@1632.14,343.06 ccw(c1641.54,352.46) P3.8@1641.54,339.17 ; P3.8@1633.35,341.85 cw(c1625.68,334.17) P3.8@1636.54,334.17
PB8: P3.9 U1.61 | length 1268
  Top Layer w10: U1.61 921.39,904.5 1310.5,904.5 1370,845 1370,484.04 1391.04,463 1536.25,463 1599.12,400.12 1624.88,400.12 1680.91,344.09 P3.9 ; 1665.35,359.65 cw(c1639.88,334.17) P3.9@1675.91,334.17
PB9: R4.1 U1.62 | length 1834
  Top Layer w10: U1.62 1222.27,923.27 1240,941 1392,941 v3(1441,990) ; v3@1433.5,990 cw(c1415.39,990) 1428.2,977.2 cw(c1441,964.39) v3@1441,982.5 ; R4.1@1946.38,822.56 ccw(c1848.31,920.63) 1987,920.63 ; R4.1@1953.45,815.49 ccw(c1872.45,896.49) 1987,896.49 ; R4.1 1966,808 1987,829 ; R4.1@1960.52,808.42 ccw(c1896.59,872.35) 1987,872.35 ; R4.1@1967.59,801.35 ccw(c1920.73,848.21) 1987,848.21 ; R4.1@1970.28,826.35 ccw(c1976.82,839.18) 1987,829 ; R4.1@1974.66,794.28 ccw(c1944.87,824.06) 1987,824.06 ; R4.1@1981.27,811.27 cw(c2001.47,814.53) 1987,829 ; v3@1981.7,984.7 cw(c1968.89,971.89) 1987,971.89 cw(c2005.11,971.89) v3@1992.3,984.7 ; v3(1987,990) 1987,829
  Bottom Layer w10: v3@1441,982.5 cw(c1441,961.98) 1455.51,976.49 ; v3(1441,990) 1442,990 1495,937 1806,937 1859,990 v3@1977,990 ; v3@1448.5,990 ccw(c1464.19,990) 1453.1,978.9 ; v3@1981.7,984.7 ccw(c1968.89,971.89) 1968.89,990 ccw(c1968.89,1008.11) v3@1981.7,995.3
PB10: U1.29
PB11: U1.30
PB12: P2.3 U1.33 | length 329.2
  Top Layer w10: U1.33 552.36,449.64 657.28,344.72 P2.3
PB13: P2.4 U1.34 | length 364.6
  Top Layer w10: U1.34 572.05,458.95 672.5,358.5 686.5,358.5 696.65,348.35 P2.4 ; P2.4@693.12,337.71 ccw(c684.58,346.24) 696.65,346.24 ccw(c708.72,346.24) P2.4@700.19,337.71
PB14: P2.5 U1.35 | length 428.2
  Top Layer w10: U1.35 591.73,465.27 681.5,375.5 707.5,375.5 736.02,346.98 P2.5 ; 718.45,364.55 cw(c688.08,334.19) P2.5@731.02,334.19 ; P2.5@732.49,337.72 ccw(c723.95,346.26) 736.02,346.26 ccw(c748.1,346.26) P2.5@739.56,337.72 ; 735.52,347.48 cw(c722.22,334.19) P2.5@741.02,334.19
PB15: P2.6 U1.36 | length 449.1
  Top Layer w10: U1.36 611.42,475.58 694,393 731,393 775.39,348.61 P2.6 ; 756.65,367.35 cw(c723.48,334.17) P2.6@770.39,334.17 ; P2.6@771.86,337.71 ccw(c763.32,346.24) 775.39,346.24 ccw(c787.46,346.24) P2.6@778.93,337.71 ; 773.72,350.28 cw(c757.62,334.17) P2.6@780.39,334.17
PC0: R8.1 U1.8 | length 543.1
  Top Layer w10: U1.8 709.84,1163.16 703,1170 703,1315 715,1327 839,1327 844,1322 ; R8.1@831.39,1291.57 ccw(c800.99,1322) 844,1322 ; R8.1 844,1279 844,1322 ; R8.1@858.27,1293.48 cw(c879.61,1322) 844,1322
PC1: P1.3 U1.9 | length 443
  Top Layer w10: U1.9 690.16,1151.8 683,1158.96 683,1338 715.16,1370.16 P1.3 ; P1.3@711.62,1414.26 cw(c703.09,1405.72) 715.16,1405.72 cw(c727.23,1405.72) P1.3@718.69,1414.26
PC2: U1.10
PC3: U1.11
PC4: P1.7 U1.24 | length 1195.9
  Top Layer w10: U1.24 258.16,824.84 189,894 189,1132 237,1180 503,1180 557.68,1234.68 P1.7 ; P1.7@554.14,1414.26 cw(c545.61,1405.72) 557.68,1405.72 cw(c569.75,1405.72) P1.7@561.21,1414.26
PC5: P1.8 U1.25 | length 1222.2
  Top Layer w10: U1.25 237.84,805.16 166,877 166,1150 221,1205 479,1205 516,1242 516,1440.92 P1.8 ; 516,1400.15 cw(c535.95,1400.15) P1.8@521.84,1414.26
PC6: P2.7 U1.37 | length 412.5
  Top Layer w10: U1.37 631.1,485.9 707,410 748,410 814.76,343.24 P2.7 ; 799.82,358.18 cw(c775.81,334.17) P2.7@809.76,334.17
PC7: P2.8 U1.38 | length 399.3
  Top Layer w10: U1.38 650.79,494.21 717,428 767,428 854.13,340.87 P2.8
PC8: P2.9 U1.39 | length 407.6
  Top Layer w10: U1.39 670.47,504.53 730,445 780.28,445 893.5,331.77 P2.9
PC9: U1.40
PC10: U1.51
PC11: U1.52
PC12: U1.53
PC13: U1.2
PC14: U1.3
PC15: U1.4
PD2: U1.54
RESET: J1.4 R1.2 U1.7 | length 1110.7
  Top Layer w10: v1@725,839 v1(729.53,843.53) U1.7 729.53,1175.72 R1.2 ; v1@726.1,846.95 ccw(c717.84,855.22) 729.53,855.22 ccw(c741.22,855.22) v1@732.95,846.95
  Bottom Layer w10: v1@729.53,838.69 cw(c729.53,826.99) 737.79,835.26 cw(c746.06,843.53) v1@734.37,843.53 ; v1(729.53,843.53) 808.06,765 J1.4 ; J1.4@1244.09,749.09 ccw(c1205.68,710.68) 1205.68,765 ccw(c1205.68,819.32) J1.4@1244.09,780.91 ; J1.4@1251.16,756.16 ccw(c1229.82,734.82) 1229.82,765 ccw(c1229.82,795.18) J1.4@1251.16,773.84
RS232_IN: D5.2 F3.2 U2.13 | length 1037.8
  Top Layer w10: F3.2 1737,1160 ; F3.2@1652.13,1152.4 cw(c1670.48,1134.05) 1670.48,1160 cw(c1670.48,1185.95) F3.2@1652.13,1167.6 ; 1707.07,1160 ccw(c1707.07,1181.93) v1@1722.58,1166.42 ; v1@1726,1158.16 cw(c1726,1127.15) 1747.92,1149.08 ; v1@1730.58,1164.58 ccw(c1737,1166.79) 1737,1160 ; U2.13 1837,670 1892,725 1892,1005 1737,1160 ; U2.13@1835.47,676.81 ccw(c1835.47,696.94) 1849.71,682.71 ; U2.13@1842.28,670 cw(c1855.04,670) 1846.02,679.02
  Bottom Layer w10: v1@1722.58,986.42 ccw(c1714.31,994.69) 1726,994.69 ccw(c1737.69,994.69) v1@1729.42,986.42 ; v1@1722.58,1159.58 cw(c1714.31,1151.31) 1726,1151.31 cw(c1737.69,1151.31) v1@1729.42,1159.58 ; v1(1726,983) v1(1726,1163)
RS232_OUT: D6.2 F2.2 U2.14 | length 778
  Top Layer w10: F2.2 1655,1110 D6.2 1813,1045 1872,986 1872,751 1841,720 U2.14 ; F2.2@1644.53,1099.25 cw(c1644.53,1048.02) 1680.75,1084.25 ; F2.2@1644.53,1109.25 cw(c1644.53,1082.16) 1663.68,1101.32 ; 1688.21,1076.79 cw(c1656.42,1045) D6.2@1701.38,1045 ; D6.2@1702.47,1062.53 ccw(c1714.09,1074.16) D6.2@1714.09,1057.72 ; D6.2@1734.9,1036.01 cw(c1756.61,1014.3) 1756.61,1045 cw(c1756.61,1075.7) D6.2@1734.9,1053.99 ; U2.14@1835.47,726.81 ccw(c1835.47,756.6) 1856.54,735.54
RS232_RX: D3.1 F3.1 P5.3 | length 997.6
  Top Layer w10: D3.1@1575.89,1215.7 cw(c1548.02,1187.82) 1587.44,1187.82 ; F3.1@1579.84,1167.6 ccw(c1561.49,1185.95) 1587.44,1185.95 ccw(c1613.39,1185.95) F3.1@1595.04,1167.6 ; F3.1@1584.04,1169.31 ccw(c1573.86,1186.93) 1593.52,1181.66 ; F3.1@1587.44,1158.99 cw(c1646.26,1158.99) D3.1@1617.19,1210.12 ; F3.1 1587.44,1227.24 D3.1 1646,1240 ; 1587.44,1176.18 cw(c1636.48,1176.18) D3.1@1612.24,1218.82 ; 1587.44,1193.37 cw(c1626.71,1193.37) D3.1@1607.3,1227.51 ; 1594.59,1185.66 ccw(c1616.79,1179.71) F3.1@1598.13,1166.28 ; D3.1@1633.2,1230.39 cw(c1646,1226.67) 1646,1240 ; D3.1@1633.2,1249.61 ccw(c1646,1253.33) 1646,1240 ; P5.3@1666.72,1588.14 cw(c1622.6,1544.02) 1685,1544.02 ; P5.3@1673.79,1595.21 cw(c1646.74,1568.16) 1685,1568.16 ; 1685,1535.08 cw(c1760.04,1535.08) P5.3@1706.98,1588.14 ; 1685,1559.22 cw(c1735.89,1559.22) P5.3@1699.91,1595.21 ; P5.3 1685,1612.32 1685,1418 1684,1417 1684,1278 1646,1240
RS232_TX: D4.1 F2.1 P5.2 | length 1390.2
  Top Layer w10: 1526.46,1309.46 cw(c1581.65,1254.27) D4.1@1595.78,1331.03 ; 1539.92,1322.92 cw(c1585.84,1277.01) D4.1@1597.59,1340.87 ; 1553.38,1336.38 cw(c1590.02,1299.74) D4.1@1599.41,1350.7 ; D4.1@1561.46,1344.46 ccw(c1550.92,1355) D4.1@1565.83,1355 ; P5.2@1568.3,1588.14 cw(c1491.29,1511.13) 1600.2,1511.13 ; P5.2@1575.37,1595.21 cw(c1515.43,1535.27) 1600.2,1535.27 ; D4.1@1575.89,1379.3 ccw(c1517.22,1437.98) 1600.2,1437.98 ccw(c1683.17,1437.98) D4.1@1624.5,1379.3 ; F2.1@1577.87,1102.4 ccw(c1559.52,1084.05) 1559.52,1110 ccw(c1559.52,1135.95) F2.1@1577.87,1117.6 ; P5.2@1582.44,1602.28 cw(c1539.57,1559.41) 1600.2,1559.41 ; D4.1@1582.96,1372.23 ccw(c1541.36,1413.83) 1600.2,1413.83 ccw(c1659.03,1413.83) D4.1@1617.43,1372.23 ; F2.1 1547,1110 1513,1144 1513,1296 ; P5.2 1600.2,1602.4 D4.1 1572,1355 1513,1296 ; D4.1@1593.97,1321.2 ccw(c1577.47,1231.54) 1513,1296 ; 1600.2,1567.97 cw(c1628.73,1567.97) P5.2@1608.55,1588.14
VIN: C13.1 D1.2 P1.1 P2.1 P3.1 Q1.2 Q3.2 Q5.2 R3.2 R5.2 R7.2 U3.3 | length 5362.1
  Top Layer w40: Q3.2 415.88,471.4 P2.1 ; 469.66,417.62 cw(c407.98,355.94) R5.2@495.21,355.94 ; 805,1443.23 v1@866.23,1443.23 ; v2(1037,1345) Q5.2@1017.21,1364.79 ; v2@1041.71,1349.06 ccw(c1007.4,1319.5) Q5.2 ; v2@1042.8,1347.24 ccw(c1017.21,1337.35) Q5.2@1017.21,1364.79 ; R7.2 1072.39,1299.8 Q5.2 ; v1(1724,311) 1762,311 1773.4,299.6 1798.79,299.6 ; R3.2@1759.49,303.22 cw(c1776.1,270.91) 1801.79,296.6 1798.79,299.6 ; Q1.2@1835.33,297.38 cw(c1823.58,347.19) 1787.39,311 1798.79,299.6 ; Q1.2 1798.79,299.6 ; v2@1940,877 1940,1105 v1(1928,1117) 1925,1120 2281,1120 2290,1111 ; C13.1@2276.2,1196.87 cw(c2242.89,1163.56) 2290,1163.56 ; C13.1@2276.2,1213.13 ccw(c2242.89,1246.44) 2290,1246.44 ; D1.2@2276.3,1401.3 cw(c2243.24,1368.24) 2290,1368.24 cw(c2336.76,1368.24) D1.2@2303.7,1401.3 ; U3.3 2290,1028.35 2290,1111 ; D1.2 2290,1111 ; Q5.2 Q5.2@1017.21,1364.79 ; R3.2@1760.89,312.15 ccw(c1791.19,342.45) 1791.19,299.6 ; R3.2@1760.89,312.15 ccw(c1791.19,342.45) 1791.19,299.6 ; R3.2@1760.89,312.15 ccw(c1791.19,342.45) 1791.19,299.6 ; 1798.79,299.6 ccw(c1776.99,277.8) 1760.02,303.53 cw(c1776.99,277.8) 1798.79,299.6 ; 1798.79,299.6 ccw(c1818.49,319.3) 1836.26,297.84 cw(c1818.49,319.3) 1798.79,299.6
  Bottom Layer w40: v1(578,308) 581,311 v1(1365,311) v1(1724,311) 1829,311 1940,422 v2(1940,867) ; v1@857,1440 939,1440 1157,1222 1785,1222 1890,1117 v1(1928,1117)
  other v1: 1904,1113 855,1438 870,1447
pads on no net: P1.0 P2.0 P3.0 U2.7 U2.8 U2.9 U2.10

## Polygon pours and split planes (outlines as drawn)
GND on Top Layer "Top Layer-No Net" (solid, pour order 4): 0,0 0,1771 2362,1771 2362,1
GND on Bottom Layer "Top Layer-No Net" (solid, pour order 3): 0,0 0,1771 2362,1771 2362,1

## Silkscreen, mask and mechanical layers (free items; w line width, h text height)
Top Overlay:
  text "Vin" at 2073,1506 h40 r180
  text "GND" at 1960,1504.1 h40 r180
  text "G" at 1494,1466 h40 r180
  text "T" at 1604,1466 h40 r180
  text "R" at 1692,1466 h40 r180
  text "V" at 1152,1465 h40 r180
  text "G" at 1256,1465 h40 r180
  text "V" at 818,1394 h40 r180
  text "G" at 771,1391 h40 r180
  text "07.26" at 38,1383 h40
  text "V1.21" at 40,1310 h40
  text "G" at 601,363 h40
  text "V" at 563,362 h40
  text "G" at 1385,359 h40
  text "V" at 1347,358 h40
  text "G" at 2088,348 h40
  text "V" at 2194,348 h40
  text "V" at 97,318 h40
  text "G" at 210,318 h40
Mechanical 1:
  the board outline again, w5

## Text inside footprints (layer, text, board x,y; h text height)
C13: Top Overlay "100uF" at 2114,1238 h23.62; Top Overlay "35V" at 2135,1138 h23.62